# Altium PCB main.PcbDoc
Units mm, origin at the board's own origin, x right, y up, seen from the top; angles counter-clockwise.
Board outline 96 x 85 mm, 4 copper layers (Top Layer, Ground Layer, Power Layer, Bottom Layer), stack 1.591 mm thick; 55 components, 28 nets, 213 pads, 252 vias.
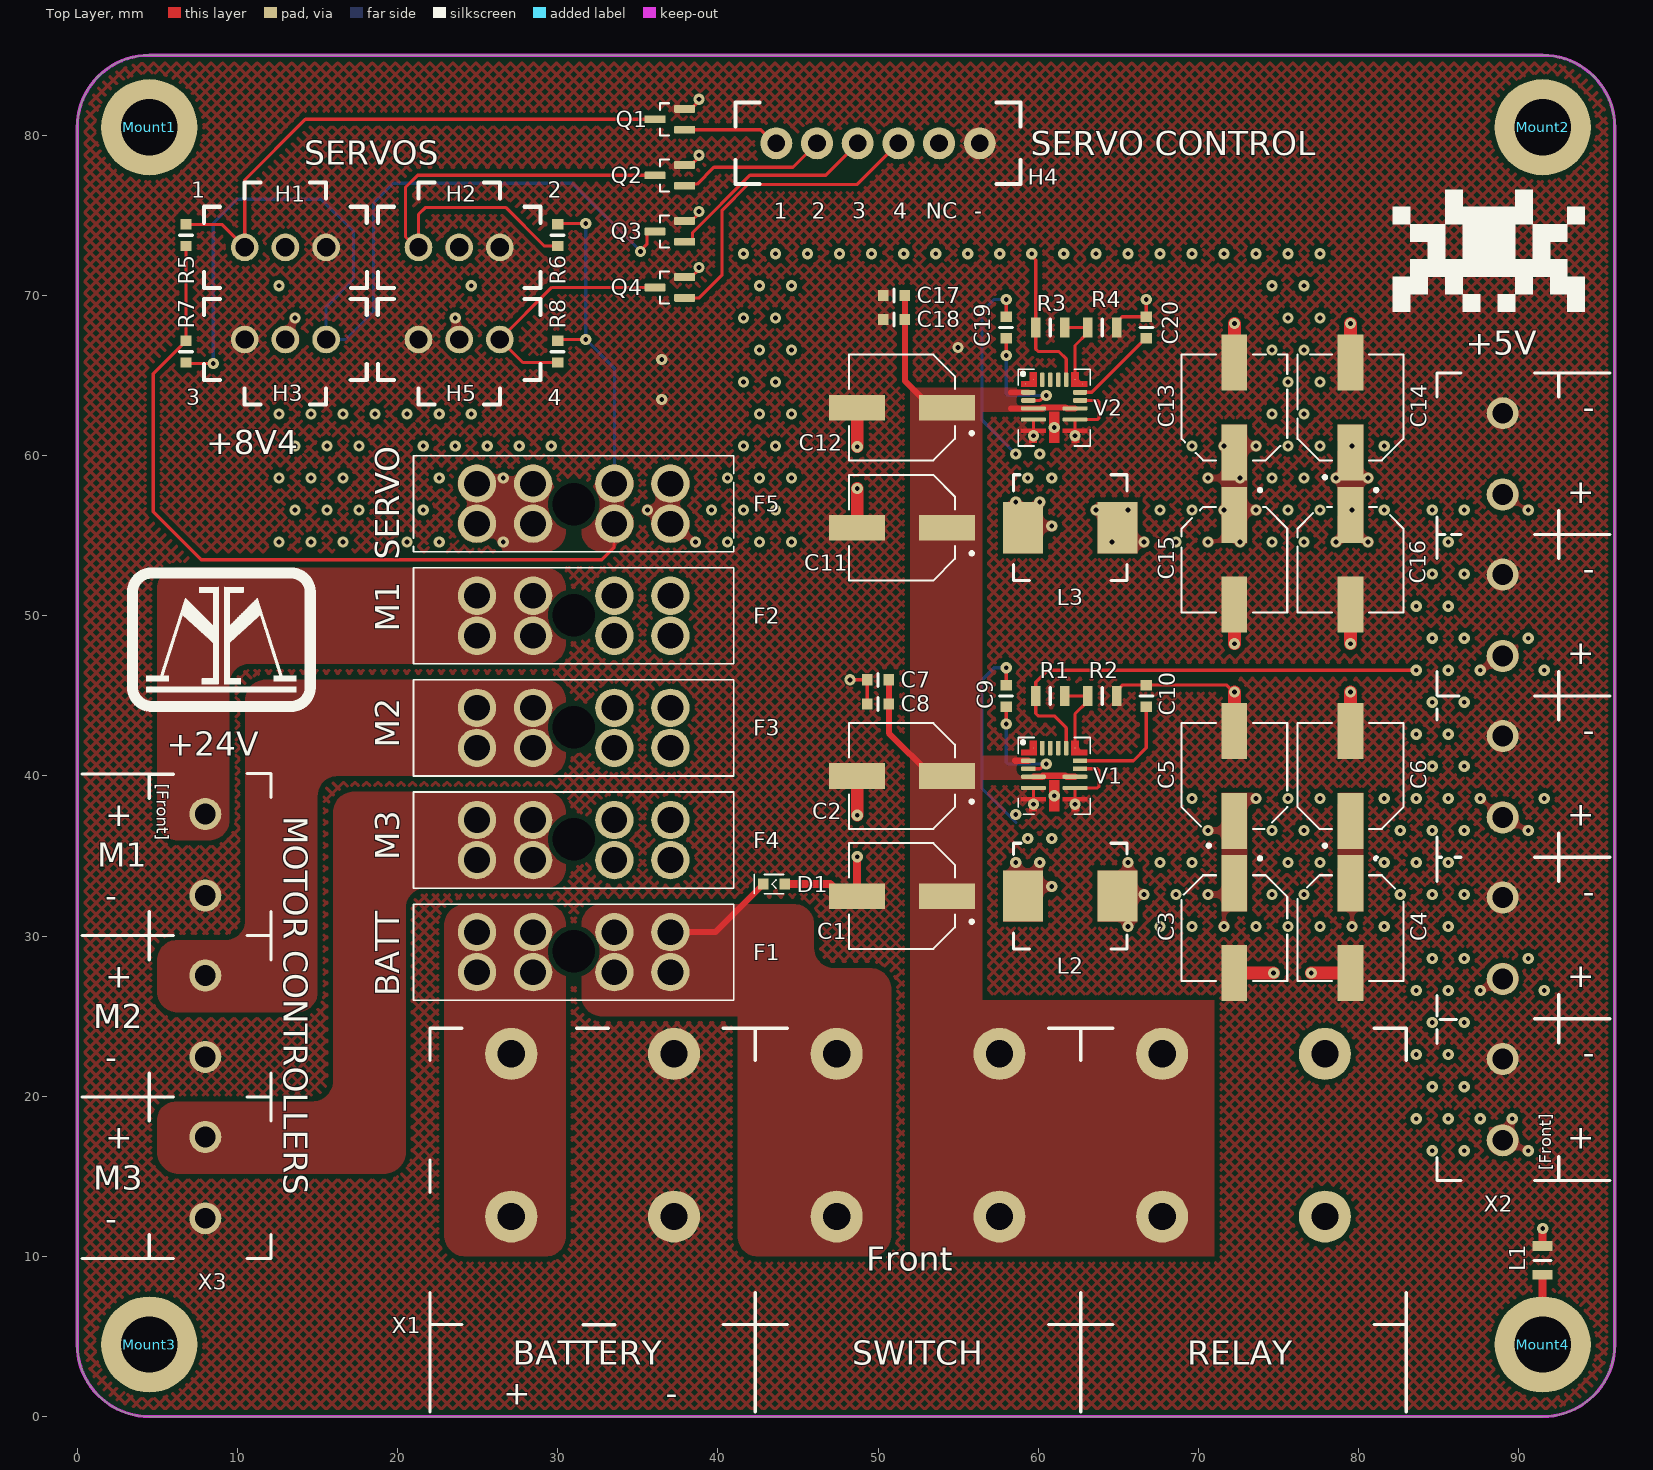
[diagram p0: Top Layer view]
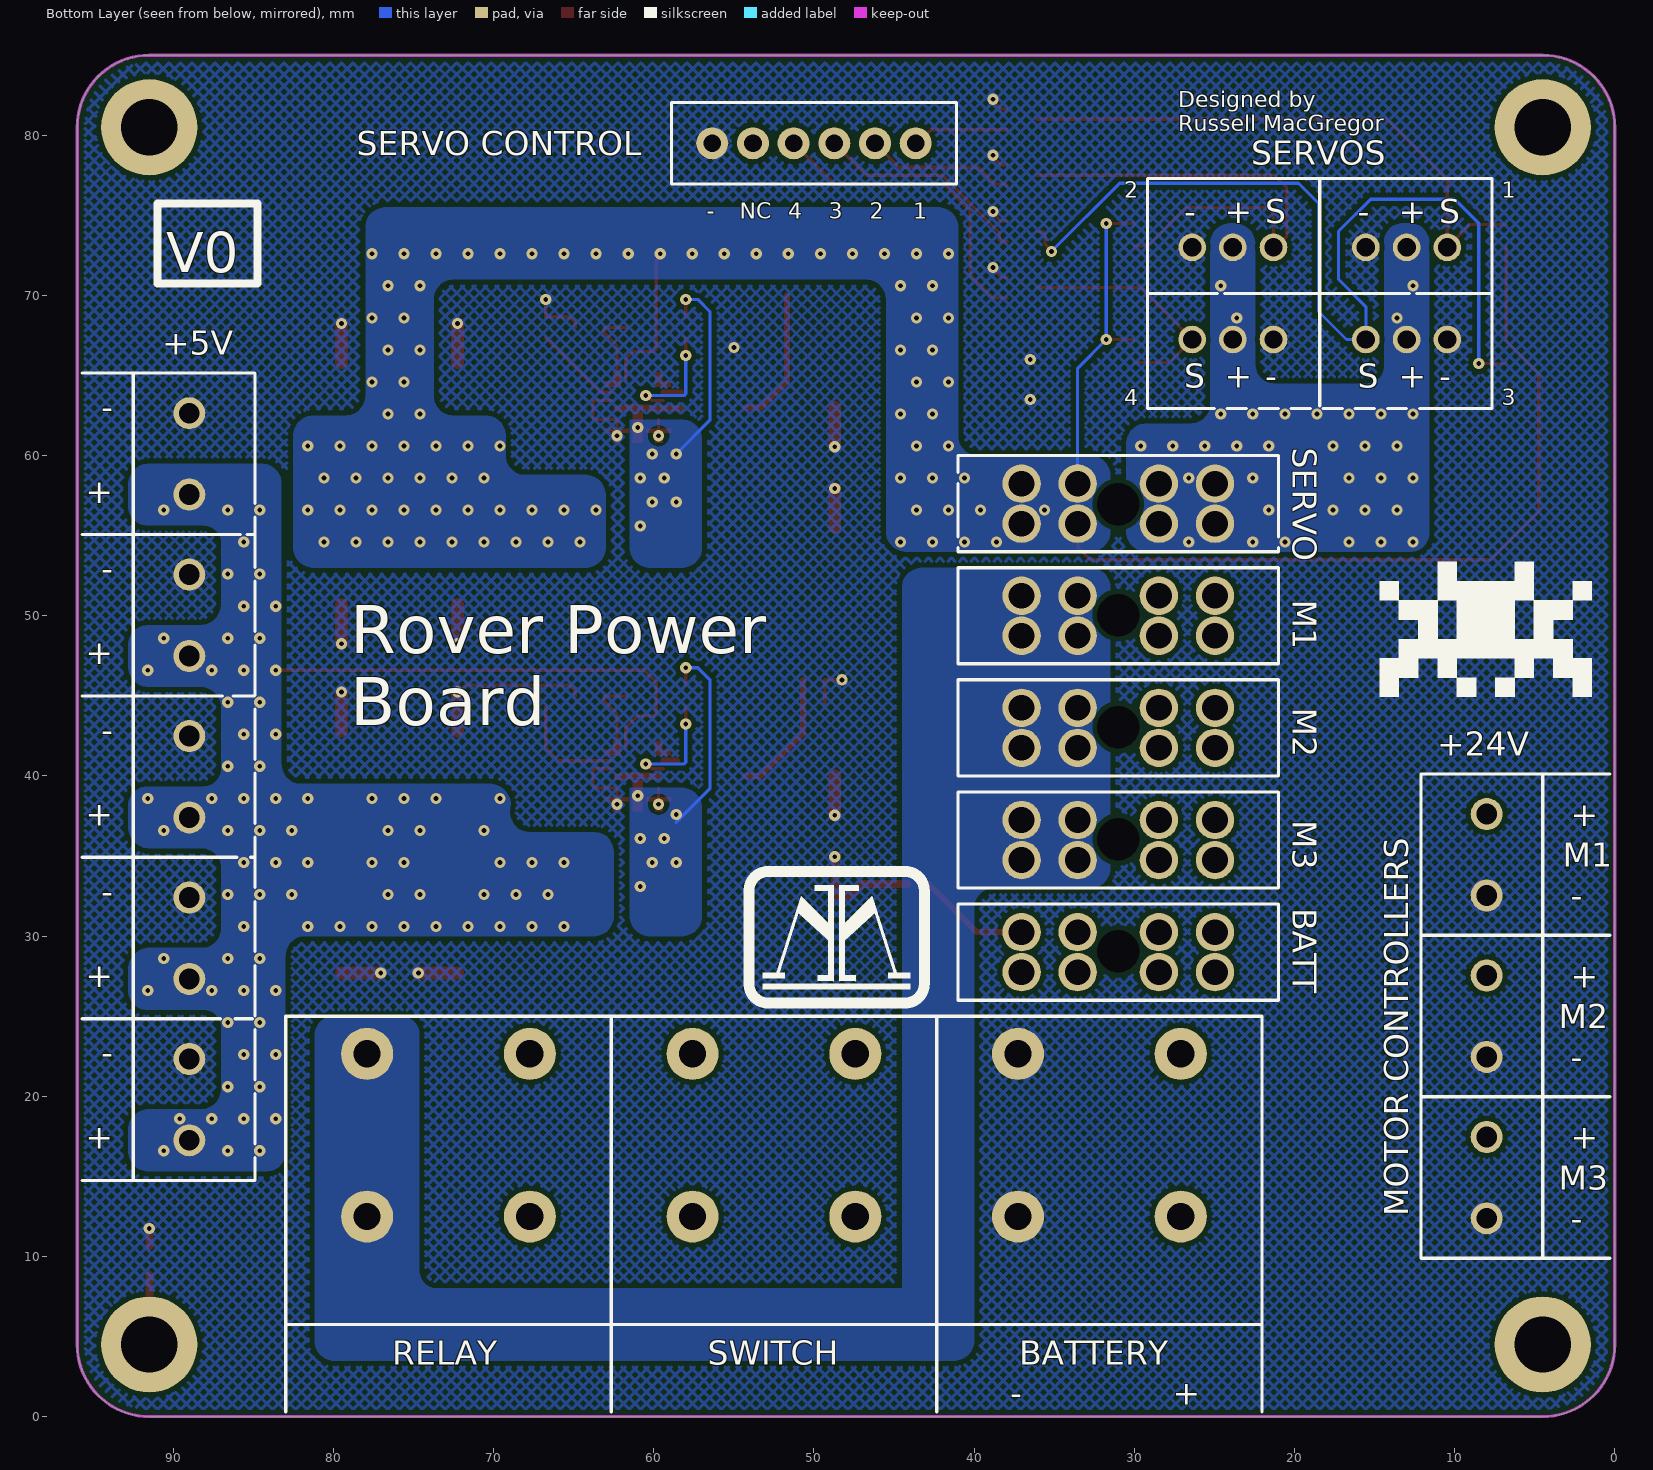
[diagram p1: Bottom Layer view, seen from below]
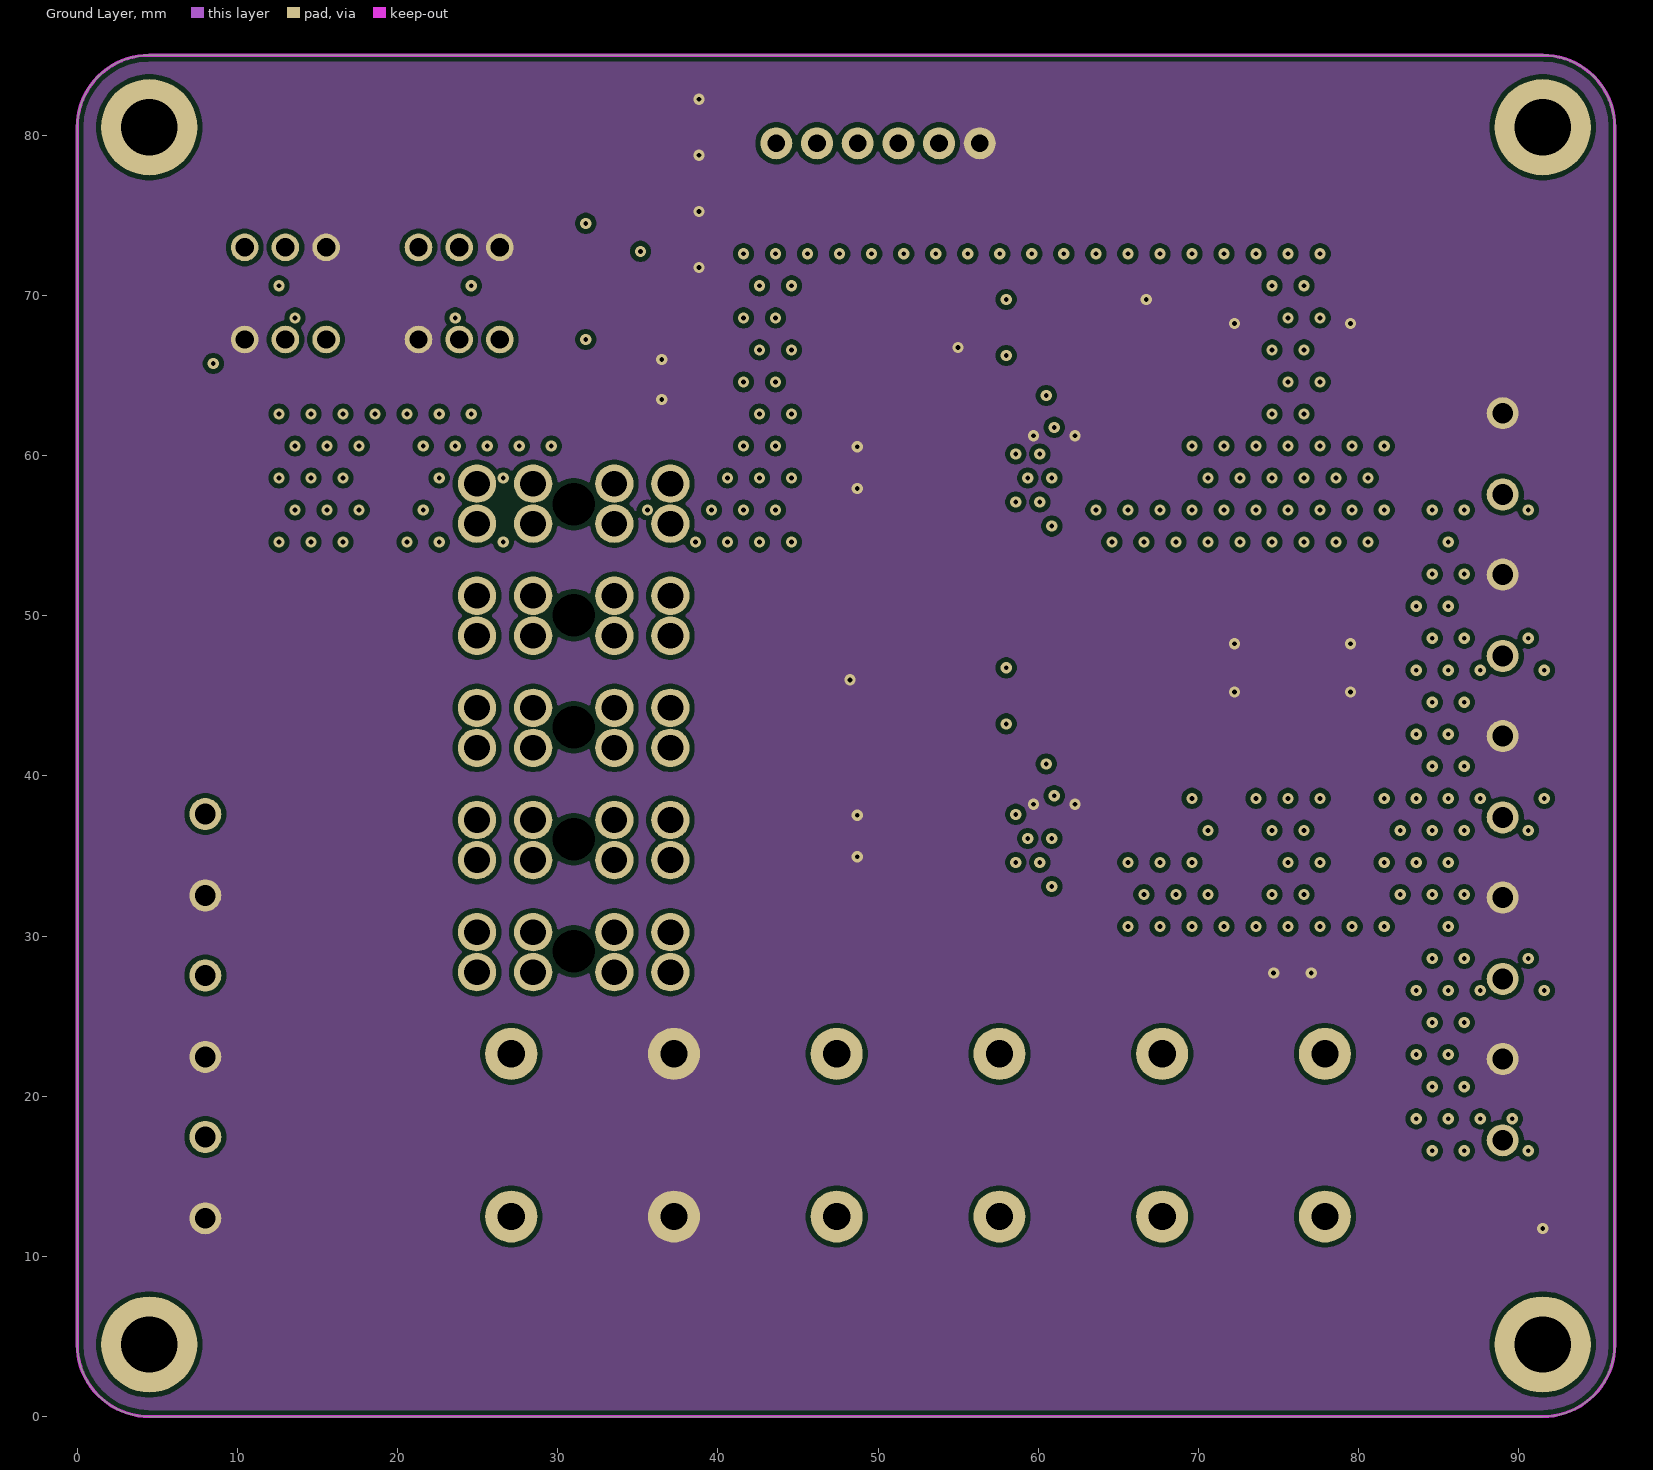
[diagram p2: Ground Layer]
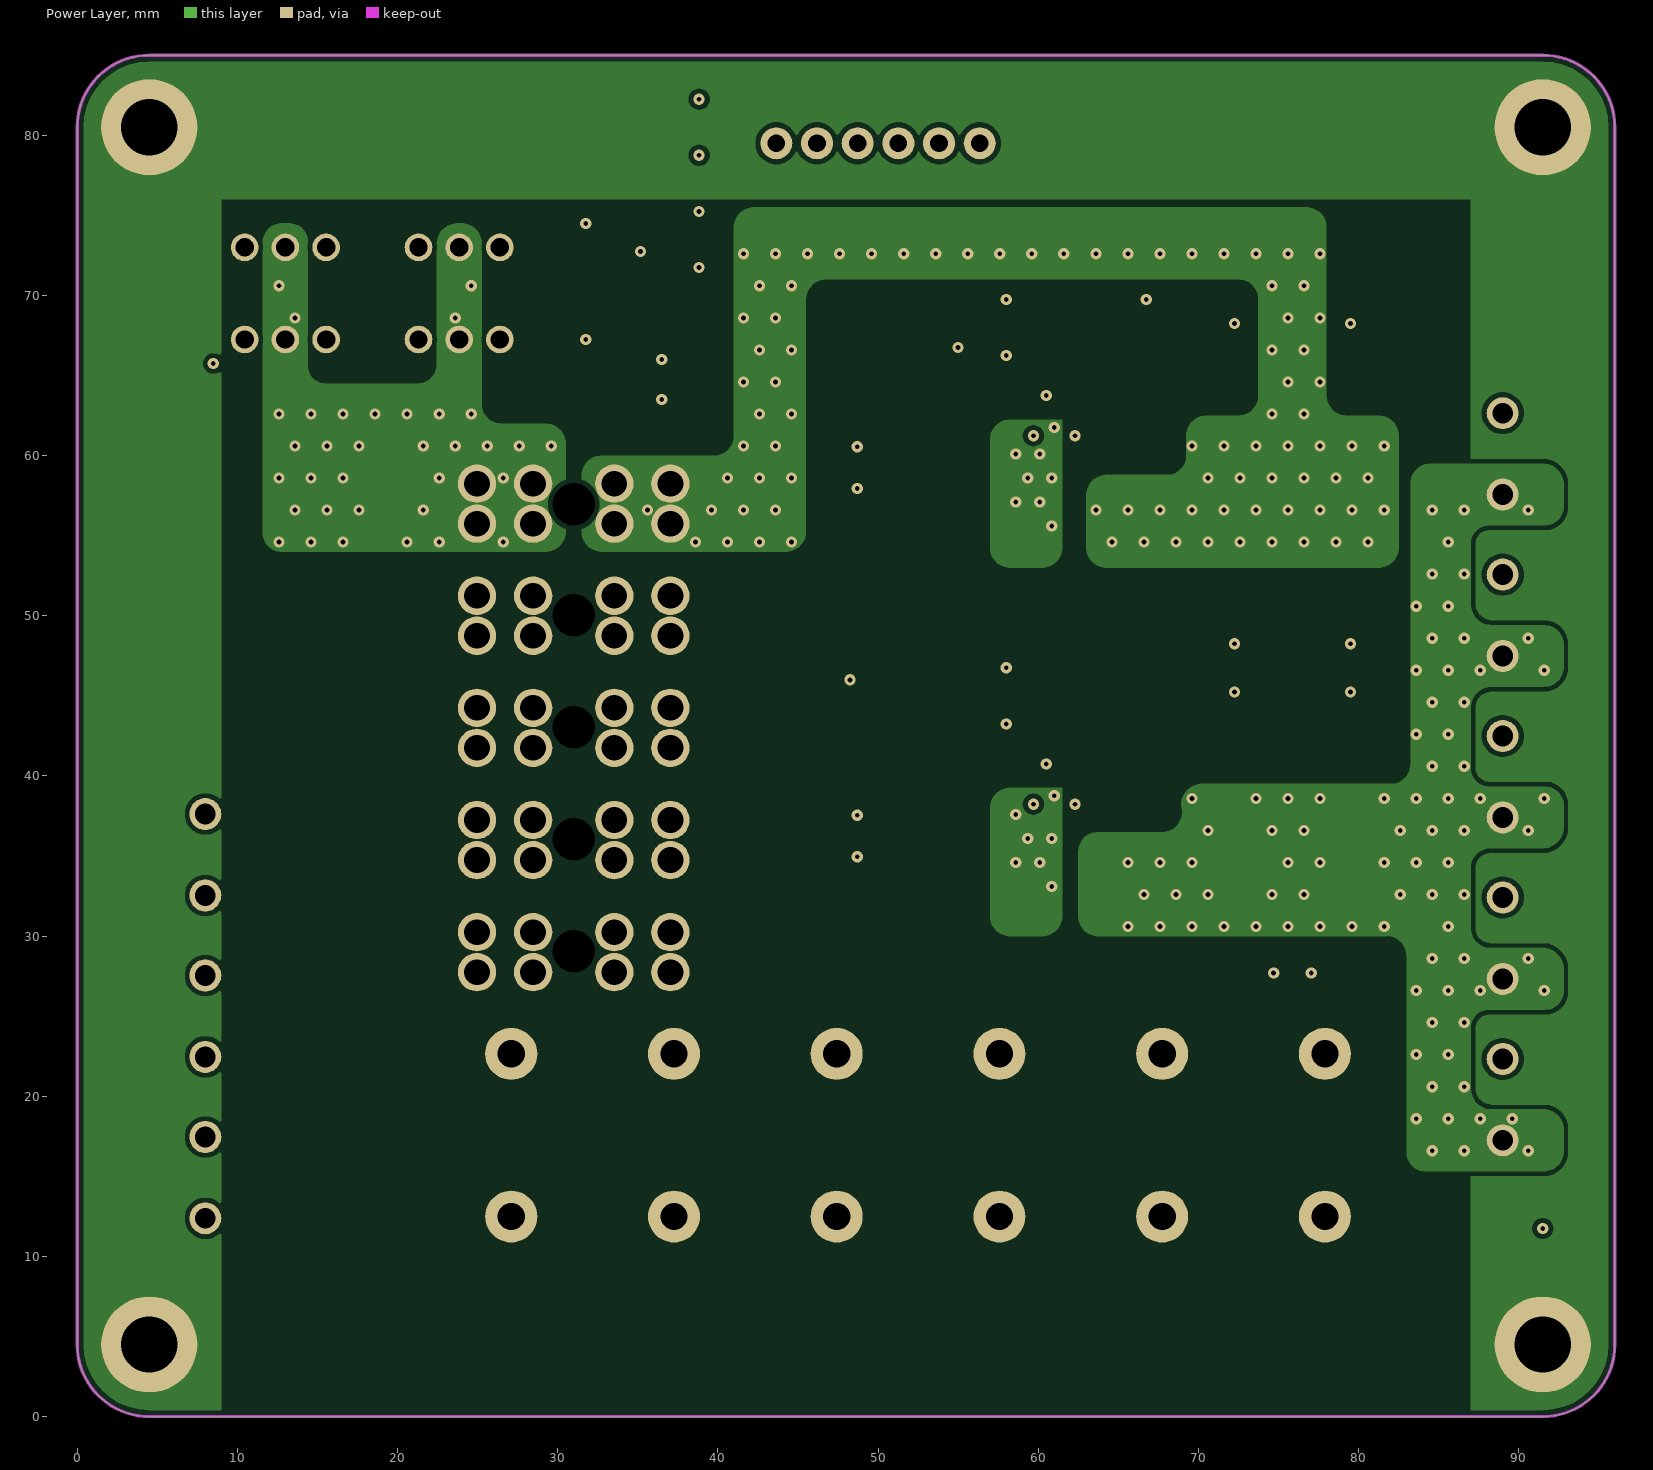
[diagram p3: Power Layer]

## Layer stack, top to bottom
Top Solder: solder mask 0.0102, Solder Resist, Dk 3.8
Top Layer: signal copper 0.035
Dielectric 2: prepreg 0.2104, 7628*1, Dk 4.4
Ground Layer: signal copper 0.0175
Dielectric 1: dielectric 1.065, FR-4, Dk 4.8
Power Layer: signal copper 0.0175
Dielectric 3: prepreg 0.2104, 7628*1, Dk 4.4
Bottom Layer: signal copper 0.035
Bottom Solder: solder mask 0.0102, Solder Resist, Dk 3.8

## Board outline
4.5,0 cw(c4.5,4.5) 0,4.5 0,80.5 cw(c4.5,80.5) 4.5,85 91.5,85 cw(c91.5,80.5) 96,80.5 96,4.5 cw(c91.5,4.5) 91.5,0

## Design rules (kind name [scope] priority, off if disabled: settings)
BoardOutlineClearance [All] p1: gap=0.2 ignorepadtopadclearanceinfootprint=FALSE
Clearance "inPolygon Clearance" [InPolygon] p1: gap=0.3 ignorepadtopadclearanceinfootprint=TRUE // this rule ensures that every net within a polygon of a different net has a set clearance from the poly
Clearance "Different Diff Pair" [All] p2: gap=0.2 ignorepadtopadclearanceinfootprint=TRUE
Clearance "Same Diff Pair" [All] p3: gap=0.1 ignorepadtopadclearanceinfootprint=TRUE
Clearance "Different Nets" [not InAnyDifferentialPair] p4: gap=0.3 ignorepadtopadclearanceinfootprint=TRUE except(0.1: Arc-SMDPad Arc-THPad Arc-Via Arc-Text Track-SMDPad Track-THPad Track-Via Track-Text SMDPad-Text THPad-Text Via-Text Fill-Text Poly-Text Region-Text Text-Text; 0.12: Arc-Arc Arc-Track Track-Track; 0.15: SMDPad-SMDPad SMDPad-THPad SMDPad-Via THPad-THPad THPad-Via Via-Via; 0.2: Arc-Hole Track-Hole SMDPad-Hole THPad-Hole Via-Hole Fill-Hole Poly-Hole Region-Hole Text-Hole)
Clearance "Same Net" [not InAnyDifferentialPair] p5: gap=0 ignorepadtopadclearanceinfootprint=TRUE except(0.1: THPad-Via; 0.18: Arc-Arc Arc-Track Track-Track)
ComponentClearance [All] p1: gap=0.102 collisioncheckmode=3 verticalgap=0.102 showdistances=TRUE
DiffPairsRouting "Ethernet Routing" [InDifferentialPairClass('Ethernet_Pairs')] p1: maxlimit=0.25 minlimit=0.2 mostfreqgap=0.25 toplayer_maxgap=0.2 toplayer_prefgap=0.2 toplayer_minwidth=0.25 toplayer_maxwidth=0.25 toplayer_prefwidth=0.25 midlayer1_mingap=0.25 midlayer1_minwidth=0.19 midlayer1_maxwidth=0.19 midlayer1_prefwidth=0.19 midlayer2_mingap=0.25 midlayer2_minwidth=0.19 midlayer2_maxwidth=0.19 midlayer2_prefwidth=0.19 bottomlayer_maxgap=0.2 bottomlayer_prefgap=0.2 bottomlayer_minwidth=0.25 bottomlayer_maxwidth=0.25 bottomlayer_prefwidth=0.25 impedanceprofiledriven=TRUE maxuncoupledlength=12.7
DiffPairsRouting "USB Routing" [InDifferentialPairClass('USB_Pairs')] p2: maxlimit=0.291 minlimit=0.127 mostfreqgap=0.291 toplayer_maxgap=0.127 toplayer_prefgap=0.127 toplayer_minwidth=0.23 toplayer_maxwidth=0.23 toplayer_prefwidth=0.23 midlayer1_mingap=0.291 midlayer1_minwidth=0.25 midlayer1_maxwidth=0.25 midlayer1_prefwidth=0.25 midlayer2_mingap=0.291 midlayer2_minwidth=0.25 midlayer2_maxwidth=0.25 midlayer2_prefwidth=0.25 bottomlayer_maxgap=0.127 bottomlayer_prefgap=0.127 bottomlayer_minwidth=0.23 bottomlayer_maxwidth=0.23 bottomlayer_prefwidth=0.23 impedanceprofiledriven=TRUE maxuncoupledlength=12.7
DiffPairsRouting "CAN Routing" [InDifferentialPairClass('CAN_Pairs')] p3: maxlimit=0.907 minlimit=0.5 mostfreqgap=0.907 toplayer_maxgap=0.5 toplayer_prefgap=0.5 toplayer_minwidth=0.201 toplayer_maxwidth=0.201 toplayer_prefwidth=0.201 midlayer1_mingap=0.907 midlayer1_minwidth=0.155 midlayer1_maxwidth=0.155 midlayer1_prefwidth=0.155 midlayer2_mingap=0.907 midlayer2_minwidth=0.155 midlayer2_maxwidth=0.155 midlayer2_prefwidth=0.155 bottomlayer_maxgap=0.5 bottomlayer_prefgap=0.5 bottomlayer_minwidth=0.201 bottomlayer_maxwidth=0.201 bottomlayer_prefwidth=0.201 impedanceprofiledriven=TRUE maxuncoupledlength=12.7
Height [All] p1: minheight=0 maxheight=1816.048 prefheight=12.7
HoleSize [All] p1: absolutevalues=TRUE maxlimit=6.3 minlimit=0.3 maxpercent=80.000 minpercent=20.000
HoleToHoleClearance [All] p1: gap=0.25 allowstackedmicrovias=FALSE
Length [All] p1: maxlimit=43.432 minlimit=0 usedelayunits=TRUE mindelay=0.000000 maxdelay=10000.000000
MatchedLengths "Diff Pair Matched Delays" [InDifferentialPairClass('Ethernet_Pairs') or InDifferentialPairClass('USB_Pairs') or InDifferentialPairClass('CAN_Pairs')] p1: tolerance=5 checknetsindiffpair=TRUE checkdiffpairvsdiffpair=FALSE checkxsignals=FALSE checkothers=FALSE usedelayunits=TRUE delaytolerance=100.000000
MinimumAnnularRing [All] p1: minimumring=0.2
MinimumSolderMaskSliver [All] p1: minsoldermaskwidth=0
PlaneClearance "Supply Net Clearance" [InNetClass('Supply_Nets')] p1: clearance=0.5
PlaneClearance "All Nets" [All] p2: clearance=0.3
PolygonConnect "Supply Nets" [InNetClass('Supply_Nets')] p1: connectstyle=Direct reliefconductorwidth=0.3 reliefentries=4 polygonreliefangle="90 Angle" airgapwidth=0.254
PolygonConnect General [All] p2: connectstyle=Relief reliefconductorwidth=0.254 reliefentries=4 polygonreliefangle="90 Angle" airgapwidth=0.254
RoutingVias [All] p1: holewidth=0.2 width=0.35 viastyle="Through Hole" minholewidth=0.15 minwidth=0.3 maxholewidth=6.3 maxwidth=6.55
SilkToSilkClearance [All] p1: silktosilkclearance=0
SilkToSolderMaskClearance [All] p1: minsilkscreentomaskgap=0 clearancetoexposedcopper=TRUE
SolderMaskExpansion [All] p1: expansion=0.075 istentingtop=FALSE
SupplyNets "Schematic Supply Nets_5" [InNet('+5V')] p1: voltage=0.000
SupplyNets "Schematic Supply Nets" [InNet('+8V4')] p2: voltage=0.000
SupplyNets "Schematic Supply Nets_3" [InNet('GND')] p3: voltage=0.000
SupplyNets "Schematic Supply Nets_1" [InNet('Earth')] p4: voltage=0.000
UnRoutedNet [All] p1: checkbadconnections=TRUE
Width [All] p1: maxlimit=100 minlimit=0.1 preferedwidth=0.3
Width "nRF Width" [InNetClass('nRF Signal')] p2: maxlimit=0.379 minlimit=0.263 preferedwidth=0.379 toplayer_minwidth=0.379 midlayer1_maxwidth=0.263 midlayer1_prefwidth=0.263 midlayer2_maxwidth=0.263 midlayer2_prefwidth=0.263 bottomlayer_minwidth=0.379 impedanceprofiledriven=TRUE minimp=50.000000 maximp=50.000000 favimp=50.000000 checkconnectedcopper=TRUE
20 further rules are at their usual default settings.

## Classes and differential pairs
net class Supply_Nets: +5V +8V4 "+24V (Batt)" "Batt VIN" Earth "FB (+5V)" "FB (+8V4)" GND "Motor VIN" NetC9_1 NetC9_2 NetC10_2 NetC19_1 NetC19_2 NetC20_2 NetF1_1 NetF2_1 NetF3_1 NetF4_1 NetF5_2 "Servo 1 PWM (8V4)" "Servo 2 PWM (8V4)" "Servo 3 PWM (8V4)" "Servo 4 PWM (8V4)"
component class "Voltage Regulators": C1 C2 C3 C4 C5 C6 C7 C8 C9 C10 C11 C12 C13 C14 C15 C16 C17 C18 C19 C20 L2 L3 R1 R2 R3 R4 V1 V2
component class "Servo Level Shifter": F5 H1 H2 H3 H4 H5 Q1 Q2 Q3 Q4 R5 R6 R7 R8
component class "Power Connections": D1 F1 F2 F3 F4 X1 X2 X3
component class Overview: L1 Mount1 Mount2 Mount3 Mount4

## Components (designator, comment, footprint, x,y, rotation, side; value= is the part's Value field where it differs from the comment)
C1 "SMD Polarized" "[Cap] SMD Polarized, 6.3mm" 51.5,32.5 r180 top
C2 "SMD Polarized" "[Cap] SMD Polarized, 6.3mm" 51.5,40 r180 top
C3 "SMD Polarized" "[Cap] SMD Polarized, 6.3mm" 72.25,30.5 r270 top
C4 "SMD Polarized" "[Cap] SMD Polarized, 6.3mm" 79.5,30.5 r270 top
C5 "SMD Polarized" "[Cap] SMD Polarized, 6.3mm" 72.25,40 r90 top
C6 "SMD Polarized" "[Cap] SMD Polarized, 6.3mm" 79.5,40 r90 top
C7 "SMD Nonpolarized" "[Cap] SMD 0603" 50,46 r0 top
C8 "SMD Nonpolarized" "[Cap] SMD 0603" 50,44.5 r0 top
C9 "SMD Nonpolarized" "[Cap] SMD 0603" 58,45 r90 top
C10 "SMD Nonpolarized" "[Cap] SMD 0603" 66.75,45 r270 top
C11 "SMD Polarized" "[Cap] SMD Polarized, 6.3mm" 51.5,55.5 r180 top
C12 "SMD Polarized" "[Cap] SMD Polarized, 6.3mm" 51.5,63 r180 top
C13 "SMD Polarized" "[Cap] SMD Polarized, 6.3mm" 72.25,63 r90 top
C14 "SMD Polarized" "[Cap] SMD Polarized, 6.3mm" 79.5,63 r90 top
C15 "SMD Polarized" "[Cap] SMD Polarized, 6.3mm" 72.25,53.5 r270 top
C16 "SMD Polarized" "[Cap] SMD Polarized, 6.3mm" 79.5,53.5 r270 top
C17 "SMD Nonpolarized" "[Cap] SMD 0603" 51,70 r0 top
C18 "SMD Nonpolarized" "[Cap] SMD 0603" 51,68.5 r0 top
C19 "SMD Nonpolarized" "[Cap] SMD 0603" 58,68 r90 top
C20 "SMD Nonpolarized" "[Cap] SMD 0603" 66.75,68 r270 top
D1 "TVS/Zener" "[Diode] SMD 0603" 43.5,33.25 r180 top
F1 "Thru-Hole" "[Fuse] Thru-Hole Blade" 31,29 r0 top
F2 "Thru-Hole" "[Fuse] Thru-Hole Blade" 31,50 r0 top
F3 "Thru-Hole" "[Fuse] Thru-Hole Blade" 31,43 r0 top
F4 "Thru-Hole" "[Fuse] Thru-Hole Blade" 31,36 r0 top
F5 "Thru-Hole" "[Fuse] Blade (2)" 31,57 r180 top
H1 "1x3 Male" "[Header] Shrouded 1x3 Male" 13,73 r0 top
H2 "1x3 Male" "[Header] Shrouded 1x3 Male" 23.85,73 r0 top
H3 "1x3 Male" "[Header] Shrouded 1x3 Male" 13,67.25 r180 top
H4 "[Header] Shrouded 1x6 Male" "[Header] Shrouded 1x6 Male" 50,79.5 r0 top
H5 "1x3 Male" "[Header] Shrouded 1x3 Male" 23.85,67.25 r180 top
L1 "742792040" "[Ferrite] SMD Bead 0805 (2)" 91.5,9.75 r90 top
L2 "SMD Inductor" "[Inductor] 7.4 X 6.6 X 3 MM" 62,32.5 r0 top
L3 "SMD Inductor" "[Inductor] 7.4 X 6.6 X 3 MM" 62,55.5 r0 top
Mount1 "M3 Mount Hole" "[Mount] M3 Mount Hole"#1 4.5,52.951 r0 top
Mount2 "M3 Mount Hole" "[Mount] M3 Mount Hole"#2 126.81,41.148 r90 top
Mount3 "M3 Mount Hole" "[Mount] M3 Mount Hole"#3 4.5,4.5 r90 top
Mount4 "M3 Mount Hole" "[Mount] M3 Mount Hole"#4 146.701,7.62 r90 top
Q1 "DMG1012UW-7" "[FET] N-Channel Mosfet" 37,81 r180 top
Q2 "DMG1012UW-7" "[FET] N-Channel Mosfet" 37,77.5 r180 top
Q3 "DMG1012UW-7" "[FET] N-Channel Mosfet" 37,74 r180 top
Q4 "DMG1012UW-7" "[FET] N-Channel Mosfet" 37,70.5 r180 top
R1 "[Res] SMD Resistor" "[Res] SMD 0805" 60.75,45 r180 top
R2 "[Res] SMD Resistor" "[Res] SMD 0805" 64,45 r180 top
R3 "[Res] SMD Resistor" "[Res] SMD 0805" 60.75,68 r180 top
R4 "[Res] SMD Resistor" "[Res] SMD 0805" 64,68 r180 top
R5 "[Res] SMD Resistor" "[Res] SMD 0603" 6.8,73.762 r270 top
R6 "[Res] SMD Resistor" "[Res] SMD 0603" 30,73.762 r90 top
R7 "[Res] SMD Resistor" "[Res] SMD 0603" 6.8,66.488 r90 top
R8 "[Res] SMD Resistor" "[Res] SMD 0603" 30,66.488 r90 top
V1 "[Reg] 0.8-10V Adjustable Buck" "[Reg] 0.8-10V Adjustable Buck" 61,40 r0 top
V2 "[Reg] 0.8-10V Adjustable Buck" "[Reg] 0.8-10V Adjustable Buck" 61,63 r0 top
X1 "[Screw Terminal] 6pin 65A" "[Screw Terminal] 6pin 65A" 52.5,15 r0 top
X2 "[Screw Terminal] 10pin" "[Screw Terminal] 10pin" 89,39.95 r90 top
X3 "[Screw Terminal] 6pin" "[Screw Terminal] 6pin" 8,25 r270 top

## Footprints (in the part's own frame and the unit in brackets; to place one, negate y for a bottom-side part, rotate by r counter-clockwise, add the part's x,y. Pads: shape width x height; smd on the part's side, far side on the other; paste and mask are expansions set on the pad)
"[Cap] SMD 0603" [mm]
  rect 0.65x0.7 smd: 1(-0.675,0) 2(0.675,0)
  silkscreen extent 0,-0.4 0,0.4, body extent -0.8,-0.45 0.8,0.45, height 0.8
"[Cap] SMD Polarized, 6.3mm" [mm]
  rect 3.5x1.6 smd: 1(-2.8,0) 2(2.8,0)
  silkscreen extent -4.45,-3.3 3.3,3.3, body extent -3.65,-3.3 3.65,3.3, height 5.9
"[Diode] SMD 0603" [mm]
  rect 0.65x0.7 smd: 1(0.675,0) 2(-0.675,0)
  silkscreen extent -0.6,-0.6 1.22,0.6, body extent -0.8,-0.45 0.8,0.45, height 0.8
"[Ferrite] SMD Bead 0805 (2)" [mm] "742792040"
  rect 0.6x1.25 smd: 1(-0.9,0) 2(0.9,0)
  silkscreen extent 0,-0.53 0,0.53, body extent -1,-0.6 1,0.6, height 1.1
"[FET] N-Channel Mosfet" [mm] "DMG1012UW-7"
  rrect25% 1.31x0.49 smd: 1(-0.925,0.65) 2(-0.925,-0.65) 3(0.925,0)
  silkscreen extent 0.05,-1 0.63,1, body extent -1.05,-1.07 1.05,1.07, height 1.1
"[Fuse] Blade (2)" [mm]
  round 2.4 hole 1.6: 1(-6.04,-1.25) 1(-6.04,1.25) 1(-2.54,-1.25) 1(-2.54,1.25) 2(2.54,-1.25) 2(2.54,1.25) 2(6.04,-1.25) 2(6.04,1.25)
  round 1.325 hole 2.65 unplated: ""(0,0.045)
  silkscreen extent -10,-3 10,3, body extent -10,-3 10,3, height 18.03
"[Fuse] Thru-Hole Blade" [mm]
  round 2.4 hole 1.6: 1(-6.04,-1.25) 1(-6.04,1.25) 1(-2.54,-1.25) 1(-2.54,1.25) 2(2.54,-1.25) 2(2.54,1.25) 2(6.04,-1.25) 2(6.04,1.25)
  round 1.325 hole 2.65 unplated: ""(0,0.045)
  silkscreen extent -10,-3 10,3, body extent -10,-3 10,3, height 18.03
"[Header] Shrouded 1x3 Male" [mm] "070543-0037 / Mates with 005057-9403"
  round 1.725 hole 1.15: 1(-2.54,0) 2(0,0) 3(2.54,0)
  silkscreen extent -5.08,-2.54 5.09,4.06, body extent -5.08,-2.54 5.08,4.06, height 11.67
"[Header] Shrouded 1x6 Male" [mm]
  round 2 hole 1.1: 1(-6.35,0) 2(-3.81,0) 3(-1.27,0) 4(1.27,0) 5(3.81,0) 6(6.35,0)
  silkscreen extent -8.9,-2.54 8.9,2.54, body extent -8.89,-2.54 8.89,4.06, height 11.49
"[Inductor] 7.4 X 6.6 X 3 MM" [mm]
  rect 2.5x3.2 smd: 1(-2.95,0) 2(2.95,0)
  silkscreen extent -3.55,-3.3 3.55,3.3, body extent -3.55,-3.3 3.55,3.3, height 3
"[Mount] M3 Mount Hole"#1 [mm] "Place at least 4.5mm from board edge. Plated."
  round 6 hole 3.5: 1(0,27.549)
"[Mount] M3 Mount Hole"#2 [mm] "Place at least 4.5mm from board edge. Plated."
  round 6 hole 3.5: 1(39.352,35.31)
"[Mount] M3 Mount Hole"#3 [mm] "Place at least 4.5mm from board edge. Plated."
  round 6 hole 3.5: 1(0,0)
"[Mount] M3 Mount Hole"#4 [mm] "Place at least 4.5mm from board edge. Plated."
  round 6 hole 3.5: 1(-3.12,55.201)
"[Reg] 0.8-10V Adjustable Buck" [mm] "MAX20408AFOF/VY+"
  rrect50% 0.9x0.3 smd: 1(-1.612,0.95) 2(-1.612,0.45) 10(1.612,0.45) 11(1.612,0.95)
  rrect50% 1.55x0.25 smd: 3(-1.299,-0.05) 4(-1.299,-0.75) 8(1.3,-0.75) 9(1.3,-0.05)
  round 0.025 smd: 5(-1.3,-1.763) 6(0,-1.238) 7(1.3,-1.763) 12(1.3,1.75) 12(1.787,1.475) 17(-1.788,1.475) 17(-1.3,1.75)
  rect 0.127x0.127 smd paste-0.064 mask-0.064: 10(1.612,0.45) 11(1.612,0.95)
  rrect50% 0.3x0.9 smd: 13(0.75,1.736) 14(0.25,1.736) 15(-0.25,1.737) 16(-0.75,1.737)
  Top Layer region: 2.05,1.65 1.525,1.65 1.525,1.3 2.05,1.3
  Top Layer region: 1.525,1.65 1.525,1.3 1.075,1.3 1.075,2.2 1.525,2.2
  Top Layer region: -2.05,1.65 -1.525,1.65 -1.525,1.3 -2.05,1.3
  Top Layer region: -1.525,1.65 -1.525,1.3 -1.075,1.3 -1.075,2.2 -1.525,2.2
  Top Layer region: 1.1,-1.575 0.525,-1.575 0.525,-1.325 2.075,-1.325 2.075,-1.575 1.55,-1.575 1.55,-2.2 1.1,-2.2
  Top Layer region: -1.1,-1.575 -0.525,-1.575 -0.525,-1.325 -2.075,-1.325 -2.075,-1.575 -1.55,-1.575 -1.55,-2.2 -1.1,-2.2
  Top Layer region: -0.3,-0.275 0.3,-0.275 0.3,-2.2 -0.3,-2.2
  silkscreen extent -2.25,-2.4 2.25,2.4, body extent -1.75,-1.88 1.75,1.88, height 0.8
"[Res] SMD 0603" [mm]
  rect 0.65x0.7 smd: 1(-0.675,0) 2(0.675,0)
  silkscreen extent 0,-0.4 0,0.4, body extent -0.8,-0.45 0.8,0.45, height 0.8
"[Res] SMD 0805" [mm]
  rect 0.6x1.25 smd: 1(-0.9,0) 2(0.9,0)
  silkscreen extent 0,-0.53 0,0.53, body extent -1,-0.63 1,0.63, height 0.5
"[Screw Terminal] 6pin" [mm]
  round 2 hole 1.3: 1(-12.62,0) 2(-7.54,0) 3(-2.54,0) 4(2.54,0) 5(7.54,0) 6(12.62,0)
  silkscreen extent -15.15,-3.5 15.13,4.1, body extent -15.53,-3.5 15.13,4.1, height 9.99
"[Screw Terminal] 6pin 65A" [mm]
  round 3.25 hole 1.7: 1(-25.4,-2.51) 1(-25.4,7.65) 2(-15.24,-2.51) 2(-15.24,7.65) 3(-5.08,-2.51) 3(-5.08,7.65) 4(5.08,-2.51) 4(5.08,7.65) 5(15.24,-2.51) 5(15.24,7.65) 6(25.4,-2.51) 6(25.4,7.65)
  silkscreen extent -30.48,-9.27 30.48,9.25, body extent -30.41,-9.27 31.21,9.21, height 28.49
"[Screw Terminal] 10pin" [mm]
  round 2 hole 1.3: 1(-22.7,0) 2(-17.62,0) 3(-12.62,0) 4(-7.54,0) 5(-2.54,0) 6(2.54,0) 7(7.54,0) 8(12.62,0) 9(17.62,0) 10(22.7,0)
  silkscreen extent -25.21,-3.5 25.21,4.1, body extent -25.65,-3.5 25.21,4.1, height 9.99

## Part data
C1 C2 C3 C4 C5 C6 C11 C12 C13 C14 C15 C16: library part "[Cap] SMD Polarized", Capacitance=47uF, Max Voltage=35V, Supplier Part Number 1=PCE3842CT-ND, Tolerance=20%, Diameter=6.3mm, Supplier 1=DigiKey
C7 C8 C9 C17 C18 C19: library part "[Cap] SMD Nonpolarized", Capacitance=100nF, Size Package=0603, Supplier Part Number 1=1276-1003-1-ND, Tolerance=10%, Voltage=50V, Supplier 1=DigiKey
C10 C20: library part "[Cap] SMD Nonpolarized", Capacitance=2.2uF, Size Package=0603, Supplier Part Number 1=1276-1134-1-ND, Tolerance=10%, Voltage=50V, Supplier 1=DigiKey
D1: library part "[Diode] TVS Diode", "Generic", Size Package=0603, Supplier Part Number 1=641-1679-1-ND, Supplier 1=DigiKey
F1 F2 F3 F4: library part "[Fuse] Thru-Hole Blade", Capacity=20A, Supplier Part Number 1=WK6265-ND, Supplier 1=DigiKey
F5: library part "[Fuse] Thru-Hole Blade", Capacity=10A
H1 H2 H3 H5: library part "[Header] Shrouded 1x3 Male", "070543-0037 / Mates with 005057-9403", Supplier Part Number 1=WM4825-ND, Supplier 1=DigiKey, Supplier 2=DigiKey, Supplier Part Number 2=WM2901-ND
H4: "0705430005 / Mates with 0050579406", Supplier Part Number 1=WM4804-ND, Supplier 1=DigiKey, Supplier 2=DigiKey, Supplier Part Number 2=WM2904-ND
L1: library part "[Ferrite] SMD Ferrite Bead (2)", Supplier Part Number 1=732-1620-1-ND, Supplier 1=DigiKey
L2 L3: library part "[Inductor] SMD Inductor", Inductance=2.2uH, Size Package=Nonstandard, Supplier Part Number 1=XC2402CT-ND, Supplier 1=DigiKey
Mount1 Mount2 Mount3 Mount4: library part "[Mount] M3 Mount Hole", "Place at least 4.5mm from board edge. Plated."
Q1 Q2 Q3 Q4: library part "[FET] N-Channel MOSFET"
R1: "Generic", Resistance=52.5k, Size Package=0805, Tolerance=10%
R2: "Generic", Resistance=10k, Size Package=0805, Tolerance=10%
R3: "Generic", Resistance=95k, Size Package=0805, Tolerance=1%
R4: "Generic", Resistance=10k, Size Package=0805, Tolerance=1%
R5 R6 R7 R8: "Generic", Resistance=1k, Size Package=0603, Tolerance=5%
V1 V2: "MAX20408AFOF/VY+", Supplier Part Number 1=505-MAX20408AFOF/VY+-ND, Supplier 1=DigiKey
X1: "Remember to order 3 of the screw term for one of these!", Supplier Part Number 1=A107722-ND, Supplier 1=DigiKey
X2: "x5", Supplier Part Number 1=102-6145-ND, Supplier 1=DigiKey
X3: "x3", Supplier Part Number 1=102-6145-ND, Supplier 1=DigiKey

## Via types
v1: diameter 0.7, hole 0.3, Top Layer to Bottom Layer, 252 vias

## Nets (pads, with @x,y where several pads share a name; then routed paths per layer and width w, separated by ;. In a path a pad name is that pad's centre, name@x,y a point inside that pad or via, vN(x,y) a via of type N, cw(c..) or ccw(c..) an arc to the next point about the centre after c; other vN are vias at no path point)
+5V: C3.1 C4.1 C5.1 C6.1 L2.2 R1.2 V1.13 X2.1 X2.3 X2.5 X2.7 X2.9 | length 29.5
  Top Layer w0.2: V1.13 61.75,43 61,43.75 60,43.75 59.85,43.9 R1.2 59.85,45.85 60.6,46.6 v1(83.6,46.6)
  other v1: 84.6,16.6 86.6,16.6 90.6,16.6 83.6,18.6 85.6,18.6 87.6,18.6 89.6,18.6 84.6,20.6 86.6,20.6 83.6,22.6 85.6,22.6 84.6,24.6 86.6,24.6 83.6,26.6 85.6,26.6 87.6,26.6 91.6,26.6 84.6,28.6 86.6,28.6 90.6,28.6 65.6,30.6 67.6,30.6 69.6,30.6 71.6,30.6 73.6,30.6 75.6,30.6 77.6,30.6 79.6,30.6 81.6,30.6 85.6,30.6 66.6,32.6 68.6,32.6 70.6,32.6 74.6,32.6 76.6,32.6 82.6,32.6 84.6,32.6 86.6,32.6 65.6,34.6 67.6,34.6 69.6,34.6 75.6,34.6 77.6,34.6 81.6,34.6 83.6,34.6 85.6,34.6 70.6,36.6 74.6,36.6 76.6,36.6 82.6,36.6 84.6,36.6 86.6,36.6 90.6,36.6 69.6,38.6 73.6,38.6 75.6,38.6 77.6,38.6 81.6,38.6 83.6,38.6 85.6,38.6 87.6,38.6 91.6,38.6 84.6,40.6 86.6,40.6 83.6,42.6 85.6,42.6 84.6,44.6 86.6,44.6 85.6,46.6 87.6,46.6 91.6,46.6 84.6,48.6 86.6,48.6 90.6,48.6 83.6,50.6 85.6,50.6 84.6,52.6 86.6,52.6 85.6,54.6 84.6,56.6 86.6,56.6 90.6,56.6
+8V4: C13.1 C14.1 C15.1 C16.1 F5.1 L3.2 R3.2 R5.2 R6.2 R7.2 R8.2 V2.13 | length 79.3
  Top Layer w0.2: R5.2 R7.2 6.775,67.163 6.55,66.938 6.55,66.913 4.75,65.113 4.75,56.5 7.75,53.5 32.75,53.5 33.52,54.27 33.52,55.73 F5.1@33.54,55.75 ; R8.2 30.087,67.25 v1(31.75,67.25) ; R6.2 30.063,74.5 v1(31.75,74.5) ; v1(59.6,72.6) 59.6,72.465 59.85,72.215 R3.2 59.85,66.65 60,66.5 61.289,66.5 61.75,66.039 61.75,66 V2.13
  Bottom Layer w0.2: v1(31.75,74.5) v1(31.75,67.25) 33.54,65.46 F5.1@33.54,58.25
  other v1: 38.6,54.6 40.6,54.6 42.6,54.6 44.6,54.6 64.6,54.6 66.6,54.6 68.6,54.6 70.6,54.6 72.6,54.6 74.6,54.6 76.6,54.6 78.6,54.6 80.6,54.6 35.6,56.6 39.6,56.6 41.6,56.6 43.6,56.6 63.6,56.6 65.6,56.6 67.6,56.6 69.6,56.6 71.6,56.6 73.6,56.6 75.6,56.6 77.6,56.6 79.6,56.6 81.6,56.6 40.6,58.6 42.6,58.6 44.6,58.6 70.6,58.6 72.6,58.6 74.6,58.6 76.6,58.6 78.6,58.6 80.6,58.6 41.6,60.6 43.6,60.6 69.6,60.6 71.6,60.6 73.6,60.6 75.6,60.6 77.6,60.6 79.6,60.6 81.6,60.6 42.6,62.6 44.6,62.6 74.6,62.6 76.6,62.6 41.6,64.6 43.6,64.6 75.6,64.6 77.6,64.6 42.6,66.6 44.6,66.6 74.6,66.6 76.6,66.6 41.6,68.6 43.6,68.6 75.6,68.6 77.6,68.6 42.6,70.6 44.6,70.6 74.6,70.6 76.6,70.6 41.6,72.6 43.6,72.6 45.6,72.6 47.6,72.6 49.6,72.6 51.6,72.6 53.6,72.6 55.6,72.6 57.6,72.6 61.6,72.6 63.6,72.6 65.6,72.6 67.6,72.6 69.6,72.6 71.6,72.6 73.6,72.6 75.6,72.6 77.6,72.6
"+24V (Batt)": C1.1 C2.1 C7.2 C8.2 C11.1 C12.1 C17.2 C18.2 V1.1 V1.3 V1.9 V2.1 V2.3 V2.9 X1.4 X1.5 | length 25.3
  Top Layer w0.381: C7.2 C8.2 50.675,42.675 53.35,40 C2.1 ; C17.2 C18.2 51.675,64.675 53.35,63 C12.1 ; 58.3,62.95 V2.3 60.22,62.95 60.285,63.016 61.715,63.016 61.781,62.95 V2.9 ; 58.3,63.95 V2.1 ; 58.55,40.95 V1.1 ; V1.3 60.22,39.95 60.285,40.016 61.715,40.016 61.781,39.95 V1.9
"Batt VIN": D1.1 F1.2 X1.3 | length 7
  Top Layer w0.381: F1.2@37.04,30.25 39.85,30.25 42.825,33.225 D1.1
Earth: L1.1 Mount1.1 Mount2.1 Mount3.1 Mount4.1 | length 4.3
  Top Layer w0.5: Mount4.1 L1.1
"FB (+5V)": R1.1 R2.2 V1.12 | length 5.6
  Top Layer w0.2: R1.1 R2.2 63.1,44.675 62.3,43.875 V1.12@62.3,41.75
  Top Layer w0.381: V1.12@62.3,41.75 62.575,41.475 V1.12@62.787,41.475
"FB (+8V4)": R3.1 R4.2 V2.12 | length 5.6
  Top Layer w0.2: R3.1 R4.2 63.1,67.675 62.3,66.875 V2.12@62.3,64.75
  Top Layer w0.381: V2.12@62.3,64.75 62.575,64.475 V2.12@62.787,64.475
GND: C1.2 C2.2 C3.2 C4.2 C5.2 C6.2 C7.1 C8.1 C10.1 C11.2 C12.2 C13.2 C14.2 C15.2 C16.2 C17.1 C18.1 C20.1 D1.2 H1.3 H2.3 H3.3 H4.6 H5.3 L1.2 Q1.2 Q2.2 Q3.2 Q4.2 R2.1 R4.1 V1.4 V1.5 V1.7 V1.8 V1.10 V2.4 V2.5 V2.7 V2.8 V2.10 X1.2 X2.2 X2.4 X2.6 X2.8 X2.10 X3.2 X3.4 X3.6 | length 65.7
  Top Layer w0.2: Q4.2 38.335,71.15 38.83,71.645 v1(38.83,71.75) ; Q3.2 38.335,74.65 38.83,75.145 v1(38.83,75.25) ; Q2.2 38.335,78.15 38.83,78.645 v1(38.83,78.75) ; Q1.2 38.335,81.65 38.83,82.145 v1(38.83,82.25) ; v1(48.25,46) C7.1 C8.1 ; v1(59.7,38.238) V1.4 ; v1(59.7,61.238) V2.4 ; v1(62.3,38.238) V1.8@62.3,39.25 ; V1.8 63.689,39.25 63.8,39.361 63.8,40.339 63.689,40.45 V1.10@62.613,40.45 ; v1(62.3,61.238) V2.8@62.3,62.25 ; V2.8 63.689,62.25 63.8,62.361 63.8,63.339 63.689,63.45 V2.10@62.612,63.45 ; R2.1 64.9,45.325 65.25,45.675 C10.1 71.784,45.675 72.209,45.25 v1(72.25,45.25) ; R4.1 64.9,68.325 65.25,68.675 C20.1 v1(66.75,69.75)
  Top Layer w0.5: D1.2 47,33.25 47.75,32.5 C1.2 v1(48.7,34.95) ; L1.2 v1(91.5,11.75)
  Top Layer w0.8: v1(48.7,37.55) C2.2 ; C11.2 v1(48.7,57.95) ; v1(48.7,60.55) C12.2 ; C3.2 v1(74.7,27.7) ; C5.2 v1(72.25,45.25) ; v1(72.25,48.25) C15.2 ; C13.2 v1(72.25,68.25) ; v1(77.05,27.7) C4.2 ; C6.2 v1(79.5,45.25) ; v1(79.5,48.25) C16.2 ; C14.2 v1(79.5,68.25)
  other v1: 36.5,63.5 36.5,66 55,66.75
"Motor VIN": F2.2 F3.2 F4.2 X1.6
NetC9_1: C9.1 V1.2 | length 7.2
  Top Layer w0.2: v1(58,43.25) C9.1 ; V1.2 60.118,40.45 60.418,40.75 v1(60.5,40.75)
  Bottom Layer w0.2: v1(58,43.25) 58,40.861 58.111,40.75 v1(60.5,40.75)
NetC9_2: C9.2 L2.1 V1.6 | length 12.7
  Top Layer w0.2: C9.2 v1(58,46.75)
  Bottom Layer w0.2: v1(58,46.75) 57.25,46.75 56.5,46 56.5,39.2 58.6,37.1
  other v1: 60.85,33.1 58.6,34.6 60.1,34.6 59.35,36.1 60.85,36.1 58.6,37.6 61,38.763
NetC10_2: C10.2 V1.11 | length 7
  Top Layer w0.2: V1.11@62.612,40.95 65.95,40.95 66.75,41.75 C10.2
NetC19_1: C19.1 V2.2 | length 7.2
  Top Layer w0.2: v1(58,66.25) C19.1 ; V2.2 60.118,63.45 60.418,63.75 v1(60.5,63.75)
  Bottom Layer w0.2: v1(58,66.25) 58,63.861 58.111,63.75 v1(60.5,63.75)
NetC19_2: C19.2 L3.1 V2.6 | length 12.7
  Top Layer w0.2: C19.2 v1(58,69.75)
  Bottom Layer w0.2: v1(58,69.75) 57.25,69.75 56.5,69 56.5,62.2 v1(58.6,60.1)
  other v1: 60.85,55.6 58.6,57.1 60.1,57.1 59.35,58.6 60.85,58.6 60.1,60.1 61,61.763
NetC20_2: C20.2 V2.11 | length 5.5
  Top Layer w0.2: V2.11@62.612,63.95 63.35,63.95 66.725,67.325 C20.2
NetF1_1: F1.1 X1.1
NetF2_1: F2.1 X3.1
NetF3_1: F3.1 X3.3
NetF4_1: F4.1 X3.5
NetF5_2: F5.2 H1.2 H2.2 H3.2 H5.2
  other v1: 12.6,54.6 14.6,54.6 16.6,54.6 20.6,54.6 22.6,54.6 26.6,54.6 13.6,56.6 15.6,56.6 17.6,56.6 21.6,56.6 12.6,58.6 14.6,58.6 16.6,58.6 22.6,58.6 26.6,58.6 13.6,60.6 15.6,60.6 17.6,60.6 21.6,60.6 23.6,60.6 25.6,60.6 27.6,60.6 29.6,60.6 12.6,62.6 14.6,62.6 16.6,62.6 18.6,62.6 20.6,62.6 22.6,62.6 24.6,62.6 13.6,68.6 23.6,68.6 12.6,70.6 24.6,70.6
"Servo 1 PWM (3V3)": H4.1 Q1.1 | length 6.1
  Top Layer w0.2: Q1.1 42.69,80.35 43.54,79.5 H4.1
"Servo 1 PWM (8V4)": H1.1 Q1.3 R5.1 | length 35.7
  Top Layer w0.2: R5.1 9.023,74.437 H1.1 10.46,77.21 14.25,81 Q1.3
"Servo 2 PWM (3V3)": H4.2 Q2.1 | length 9.4
  Top Layer w0.2: Q2.1 38.028,76.953 38.703,76.953 39.75,78 44.69,78 H4.2
"Servo 2 PWM (8V4)": H2.1 Q2.3 R6.1 | length 32
  Top Layer w0.2: R6.1 29.163,73.087 26.75,75.5 21.75,75.5 21.31,75.06 H2.1 21.148,73 20.5,73.648 20.5,76.75 21.25,77.5 Q2.3
"Servo 3 PWM (3V3)": H4.3 Q3.1 | length 13.8
  Top Layer w0.2: Q3.1 38.274,73.35 38.419,73.495 38.419,73.919 42,77.5 46.73,77.5 H4.3 ; Q3.1@38.335,73.35 Q3.1@38.48,73.495
"Servo 3 PWM (8V4)": H3.1 Q3.3 R7.1 | length 59.3
  Top Layer w0.2: R7.1 6.863,65.75 v1(8.5,65.75) ; v1(35.17,72.75) 35.17,72.818 35.581,73.23 35.581,73.855 35.726,74 Q3.3
  Bottom Layer w0.2: v1(8.5,65.75) 8.5,74.5 10,76 15.25,76 17.25,74 17.25,71 15.54,69.29 H3.1 16.75,67.25 18.5,69 18.5,75.75 19.75,77 30.92,77 v1(35.17,72.75)
"Servo 4 PWM (3V3)": H4.4 Q4.1 | length 19.7
  Top Layer w0.2: Q4.1 38.85,69.85 40.25,71.25 40.25,75.297 41.883,76.93 48.7,76.93 H4.4
"Servo 4 PWM (8V4)": H5.1 Q4.3 R8.1 | length 15.2
  Top Layer w0.2: R8.1 27.827,65.813 H5.1 29.64,70.5 Q4.3
pads on no net: F1. F2. F3. F4. F5. H4.5 V1.14 V1.15 V1.16 V1.17 V2.14 V2.15 V2.16 V2.17

## Polygon pours and split planes (outlines as drawn)
NetC19_2 on Top Layer "LX Top Poly" (solid, remove dead copper, pour order 36): 61.5,62.25 61.5,54.25 cw(c60.25,54.25) 60.25,53 58.25,53 cw(c58.25,54.25) 57,54.25 57,61 cw(c58.25,61) 58.25,62.25
NetC9_2 on Top Layer "LX Top Poly" (solid, remove dead copper, pour order 35): 61.5,39.25 61.5,31.25 cw(c60.25,31.25) 60.25,30 58.25,30 cw(c58.25,31.25) 57,31.25 57,38 cw(c58.25,38) 58.25,39.25
+5V on Top Layer "+5V Top Poly" (solid, remove dead copper, pour order 34): 63.75,36.5 67.75,36.5 ccw(c67.75,37.75) 68.925,38.175 cw(c70.25,38.175) 70.25,39.5 82,39.5 ccw(c82,40.75) 83.25,40.75 83.25,58.25 cw(c84.5,58.25) 84.5,59.5 91.5,59.5 cw(c91.5,58.2) 92.8,58.2 92.8,56.8 cw(c91.64,56.8) 91.64,55.64 88.14,55.64 ccw(c88.14,54.5) 87,54.5 87,50.75 ccw(c88.33,50.75) 88.33,49.42 91.58,49.42 cw(c91.58,48.2) 92.8,48.2 92.8,46.8 cw(c91.56,46.8) 91.56,45.56 88.31,45.56 ccw(c88.31,44.25) 87,44.25 87,40.5 ccw(c88.16,40.5) 88.16,39.34 91.66,39.34 cw(c91.66,38.2) 92.8,38.2 92.8,36.8 cw(c91.48,36.8) 91.48,35.48 88.23,35.48 ccw(c88.23,34.25) 87,34.25 87,30.5 ccw(c88.24,30.5) 88.24,29.26 91.49,29.26 cw(c91.49,27.95) 92.8,27.95 92.8,26.55 cw(c91.65,26.55) 91.65,25.4 88.15,25.4 ccw(c88.15,24.25) 87,24.25 87,20.5 ccw(c88.32,20.5) 88.32,19.18 91.57,19.18 cw(c91.57,17.95) 92.8,17.95 92.8,16.55 cw(c91.57,16.55) 91.57,15.32 84.18,15.32 cw(c84.18,16.5) 83,16.5 83,28.75 ccw(c81.75,28.75) 81.75,30 63.75,30 cw(c63.75,31.25) 62.5,31.25 62.5,35.25 cw(c63.75,35.25)
+8V4 on Top Layer "+8V4 Top Poly" (solid, remove dead copper, pour order 33): 63,57.5 63,54.25 ccw(c64.25,54.25) 64.25,53 81.25,53 ccw(c81.25,54.25) 82.5,54.25 82.5,61.25 ccw(c81.25,61.25) 81.25,62.5 79.25,62.5 cw(c79.25,63.75) 78,63.75 78,74.25 ccw(c76.75,74.25) 76.75,75.5 42.25,75.5 ccw(c42.25,74.25) 41,74.25 41,61.25 cw(c39.75,61.25) 39.75,60 32.75,60 ccw(c32.75,58.75) 31.5,58.75 31.5,55.25 ccw(c32.75,55.25) 32.75,54 44.25,54 ccw(c44.25,55.25) 45.5,55.25 45.5,69.75 cw(c46.75,69.75) 46.75,71 72.5,71 cw(c72.5,69.75) 73.75,69.75 73.75,63.75 cw(c72.5,63.75) 72.5,62.5 70.5,62.5 ccw(c70.5,61.25) 69.25,61.25 69.25,60 cw(c68.05,60) 68.05,58.8 64.3,58.8 ccw(c64.3,57.5)
NetF5_2 on Top Layer "Servo Power Top Poly" (solid, pour order 32): 25.25,73.25 25.25,63.25 ccw(c26.5,63.25) 26.5,62 29.25,62 cw(c29.25,60.75) 30.5,60.75 30.5,55.25 cw(c29.25,55.25) 29.25,54 12.75,54 cw(c12.75,55.15) 11.6,55.15 11.6,73.35 cw(c12.75,73.35) 12.75,74.5 13.25,74.5 cw(c13.25,73.35) 14.4,73.35 14.4,65.6 ccw(c15.5,65.6) 15.5,64.5 21.25,64.5 ccw(c21.25,65.7) 22.45,65.7 22.45,73.2 cw(c23.75,73.2) 23.75,74.5 24,74.5 cw(c24,73.25)
GND on Top Layer "Top GND Poly" (hatched 45Degree grid 0.508 track 0.203, remove dead copper, pour order 28): 0,85 96,85 96,0 0,0
NetF2_1 on Top Layer "M1 Fused Poly" (solid, remove dead copper, pour order 15): 5,37.25 5,51.75 cw(c6.25,51.75) 6.25,53 29.25,53 cw(c29.25,51.75) 30.5,51.75 30.5,48.25 cw(c29.25,48.25) 29.25,47 10.75,47 ccw(c10.75,45.75) 9.5,45.75 9.5,37.25 cw(c8.25,37.25) 8.25,36 6.25,36 cw(c6.25,37.25)
NetF3_1 on Top Layer "M2 Fused Poly" (solid, remove dead copper, pour order 17): 11.75,46 29.25,46 cw(c29.25,44.75) 30.5,44.75 30.5,41.25 cw(c29.25,41.25) 29.25,40 16.25,40 ccw(c16.25,38.75) 15,38.75 15,26.5 cw(c13.75,26.5) 13.75,25.25 6.25,25.25 cw(c6.25,26.5) 5,26.5 5,28.5 cw(c6.25,28.5) 6.25,29.75 9.25,29.75 ccw(c9.25,31) 10.5,31 10.5,44.75 cw(c11.75,44.75)
NetF4_1 on Top Layer "M3 Fused Poly" (solid, remove dead copper, pour order 18): 17.25,39 29.25,39 cw(c29.25,37.75) 30.5,37.75 30.5,34.25 cw(c29.25,34.25) 29.25,33 21.75,33 ccw(c21.75,31.75) 20.5,31.75 20.5,16.5 cw(c19.17,16.5) 19.17,15.17 6.33,15.17 cw(c6.33,16.5) 5,16.5 5,18.5 cw(c6.17,18.5) 6.17,19.67 14.67,19.67 ccw(c14.67,21) 16,21 16,37.75 cw(c17.25,37.75)
"+24V (Batt)" on Top Layer "+24V (Batt) Poly" (solid, remove dead copper, pour order 8): 52,64.25 63,64.25 63,62.75 56.5,62.75 56.5,41.25 63,41.25 63,39.75 56.5,39.75 56.5,26 71,26 71,10 52,10
"Batt VIN" on Top Layer "Batt VIN Poly" (solid, remove dead copper, pour order 1): 32.75,32 44.75,32 cw(c44.75,30.75) 46,30.75 46,29.25 ccw(c47.25,29.25) 47.25,28 49.5,28 cw(c49.5,26.68) 50.82,26.68 50.82,11.32 cw(c49.5,11.32) 49.5,10 42.5,10 cw(c42.5,11.25) 41.25,11.25 41.25,25 32.75,25 cw(c32.75,26.25) 31.5,26.25 31.5,30.75 cw(c32.75,30.75)
NetF1_1 on Top Layer "NONET_L01_P-001" (solid, remove dead copper, pour order 0): 24.25,32 29.25,32 cw(c29.25,30.75) 30.5,30.75 30.5,11.25 cw(c29.25,11.25) 29.25,10 24.25,10 cw(c24.25,11.33) 22.92,11.33 22.92,30.67 cw(c24.25,30.67)
GND on Bottom Layer "Bottom GND Poly" (hatched 45Degree grid 0.508 track 0.203, remove dead copper, pour order 29): 0,85 96,85 96,0 0,0
NetF5_2 on Bottom Layer "Servo Power Bottom Poly" (solid, pour order 27): 25.25,73.25 25.25,63.25 ccw(c26.5,63.25) 26.5,62 29.25,62 cw(c29.25,60.75) 30.5,60.75 30.5,55.25 cw(c29.25,55.25) 29.25,54 12.75,54 cw(c12.75,55.15) 11.6,55.15 11.6,73.35 cw(c12.75,73.35) 12.75,74.5 13.25,74.5 cw(c13.25,73.35) 14.4,73.35 14.4,65.6 ccw(c15.5,65.6) 15.5,64.5 21.25,64.5 ccw(c21.25,65.7) 22.45,65.7 22.45,73.2 cw(c23.75,73.2) 23.75,74.5 24,74.5 cw(c24,73.25)
NetC19_2 on Bottom Layer "LX Bottonm Poly" (solid, remove dead copper, pour order 23): 61.5,62.25 61.5,54.25 cw(c60.25,54.25) 60.25,53 58.25,53 cw(c58.25,54.25) 57,54.25 57,61 cw(c58.25,61) 58.25,62.25
+5V on Bottom Layer "+5V Bottom Poly" (solid, remove dead copper, pour order 6): 63.75,36.5 67.75,36.5 ccw(c67.75,37.75) 68.925,38.175 cw(c70.25,38.175) 70.25,39.5 82,39.5 ccw(c82,40.75) 83.25,40.75 83.25,58.25 cw(c84.5,58.25) 84.5,59.5 91.5,59.5 cw(c91.5,58.2) 92.8,58.2 92.8,56.8 cw(c91.64,56.8) 91.64,55.64 88.14,55.64 ccw(c88.14,54.5) 87,54.5 87,50.75 ccw(c88.33,50.75) 88.33,49.42 91.58,49.42 cw(c91.58,48.2) 92.8,48.2 92.8,46.8 cw(c91.56,46.8) 91.56,45.56 88.31,45.56 ccw(c88.31,44.25) 87,44.25 87,40.5 ccw(c88.16,40.5) 88.16,39.34 91.66,39.34 cw(c91.66,38.2) 92.8,38.2 92.8,36.8 cw(c91.48,36.8) 91.48,35.48 88.23,35.48 ccw(c88.23,34.25) 87,34.25 87,30.5 ccw(c88.24,30.5) 88.24,29.26 91.49,29.26 cw(c91.49,27.95) 92.8,27.95 92.8,26.55 cw(c91.65,26.55) 91.65,25.4 88.15,25.4 ccw(c88.15,24.25) 87,24.25 87,20.5 ccw(c88.32,20.5) 88.32,19.18 91.57,19.18 cw(c91.57,17.95) 92.8,17.95 92.8,16.55 cw(c91.57,16.55) 91.57,15.32 84.18,15.32 cw(c84.18,16.5) 83,16.5 83,28.75 ccw(c81.75,28.75) 81.75,30 63.75,30 cw(c63.75,31.25) 62.5,31.25 62.5,35.25 cw(c63.75,35.25)
NetC9_2 on Bottom Layer "LX Bottom Poly" (solid, remove dead copper, pour order 20): 61.5,39.25 61.5,31.25 cw(c60.25,31.25) 60.25,30 58.25,30 cw(c58.25,31.25) 57,31.25 57,38 cw(c58.25,38) 58.25,39.25
+8V4 on Bottom Layer "+8V4 Bottom Poly" (solid, remove dead copper, pour order 19): 63,57.5 63,54.25 ccw(c64.25,54.25) 64.25,53 81.25,53 ccw(c81.25,54.25) 82.5,54.25 82.5,61.25 ccw(c81.25,61.25) 81.25,62.5 79.25,62.5 cw(c79.25,63.75) 78,63.75 78,74.25 ccw(c76.75,74.25) 76.75,75.5 42.25,75.5 ccw(c42.25,74.25) 41,74.25 41,61.25 cw(c39.75,61.25) 39.75,60 32.75,60 ccw(c32.75,58.75) 31.5,58.75 31.5,55.25 ccw(c32.75,55.25) 32.75,54 44.25,54 ccw(c44.25,55.25) 45.5,55.25 45.5,69.75 cw(c46.75,69.75) 46.75,71 72.5,71 cw(c72.5,69.75) 73.75,69.75 73.75,63.75 cw(c72.5,63.75) 72.5,62.5 70.5,62.5 ccw(c70.5,61.25) 69.25,61.25 69.25,60 cw(c68.05,60) 68.05,58.8 64.3,58.8 ccw(c64.3,57.5)
"Motor VIN" on Bottom Layer "Motor VIN Poly" (solid, remove dead copper, pour order 13): 74.64,9.14 74.64,23.89 cw(c75.75,23.89) 75.75,25 80,25 cw(c80,23.84) 81.16,23.84 81.16,4.66 cw(c80,4.66) 80,3.5 41.25,3.5 cw(c41.25,4.75) 40,4.75 40,31.75 ccw(c38.75,31.75) 38.75,33 32.75,33 cw(c32.75,34.25) 31.5,34.25 31.5,51.75 cw(c32.75,51.75) 32.75,53 43.25,53 cw(c43.25,51.75) 44.5,51.75 44.5,8 73.5,8 ccw(c73.5,9.14)
NetC19_2 on Power Layer "LX Middle Poly" (solid, remove dead copper, pour order 22): 61.5,62.25 61.5,54.25 cw(c60.25,54.25) 60.25,53 58.25,53 cw(c58.25,54.25) 57,54.25 57,61 cw(c58.25,61) 58.25,62.25
NetC9_2 on Power Layer "LX Middle Poly" (solid, remove dead copper, pour order 3): 61.5,39.25 61.5,31.25 cw(c60.25,31.25) 60.25,30 58.25,30 cw(c58.25,31.25) 57,31.25 57,38 cw(c58.25,38) 58.25,39.25
+5V on Power Layer "+5V Middle Poly" (solid, remove dead copper, pour order 21): 63.75,36.5 67.75,36.5 ccw(c67.75,37.75) 68.925,38.175 cw(c70.25,38.175) 70.25,39.5 82,39.5 ccw(c82,40.75) 83.25,40.75 83.25,58.25 cw(c84.5,58.25) 84.5,59.5 91.5,59.5 cw(c91.5,58.2) 92.8,58.2 92.8,56.8 cw(c91.64,56.8) 91.64,55.64 88.14,55.64 ccw(c88.14,54.5) 87,54.5 87,50.75 ccw(c88.33,50.75) 88.33,49.42 91.58,49.42 cw(c91.58,48.2) 92.8,48.2 92.8,46.8 cw(c91.56,46.8) 91.56,45.56 88.31,45.56 ccw(c88.31,44.25) 87,44.25 87,40.5 ccw(c88.16,40.5) 88.16,39.34 91.66,39.34 cw(c91.66,38.2) 92.8,38.2 92.8,36.8 cw(c91.48,36.8) 91.48,35.48 88.23,35.48 ccw(c88.23,34.25) 87,34.25 87,30.5 ccw(c88.24,30.5) 88.24,29.26 91.49,29.26 cw(c91.49,27.95) 92.8,27.95 92.8,26.55 cw(c91.65,26.55) 91.65,25.4 88.15,25.4 ccw(c88.15,24.25) 87,24.25 87,20.5 ccw(c88.32,20.5) 88.32,19.18 91.57,19.18 cw(c91.57,17.95) 92.8,17.95 92.8,16.55 cw(c91.57,16.55) 91.57,15.32 84.18,15.32 cw(c84.18,16.5) 83,16.5 83,28.75 ccw(c81.75,28.75) 81.75,30 63.75,30 cw(c63.75,31.25) 62.5,31.25 62.5,35.25 cw(c63.75,35.25)
+8V4 on Power Layer "+8V4 Middle Poly" (solid, remove dead copper, pour order 11): 63,57.5 63,54.25 ccw(c64.25,54.25) 64.25,53 81.25,53 ccw(c81.25,54.25) 82.5,54.25 82.5,61.25 ccw(c81.25,61.25) 81.25,62.5 79.25,62.5 cw(c79.25,63.75) 78,63.75 78,74.25 ccw(c76.75,74.25) 76.75,75.5 42.25,75.5 ccw(c42.25,74.25) 41,74.25 41,61.25 cw(c39.75,61.25) 39.75,60 32.75,60 ccw(c32.75,58.75) 31.5,58.75 31.5,55.25 ccw(c32.75,55.25) 32.75,54 44.25,54 ccw(c44.25,55.25) 45.5,55.25 45.5,69.75 cw(c46.75,69.75) 46.75,71 72.5,71 cw(c72.5,69.75) 73.75,69.75 73.75,63.75 cw(c72.5,63.75) 72.5,62.5 70.5,62.5 ccw(c70.5,61.25) 69.25,61.25 69.25,60 cw(c68.05,60) 68.05,58.8 64.3,58.8 ccw(c64.3,57.5)
NetF5_2 on Power Layer "Servo Power Middle Poly" (solid, pour order 24): 25.25,73.25 25.25,63.25 ccw(c26.5,63.25) 26.5,62 29.25,62 cw(c29.25,60.75) 30.5,60.75 30.5,55.25 cw(c29.25,55.25) 29.25,54 12.75,54 cw(c12.75,55.15) 11.6,55.15 11.6,73.35 cw(c12.75,73.35) 12.75,74.5 13.25,74.5 cw(c13.25,73.35) 14.4,73.35 14.4,65.6 ccw(c15.5,65.6) 15.5,64.5 21.25,64.5 ccw(c21.25,65.7) 22.45,65.7 22.45,73.2 cw(c23.75,73.2) 23.75,74.5 24,74.5 cw(c24,73.25)
Earth on Power Layer "Earth Poly" (solid, pour order 30): 0,86 96,86 96,0 87,0 87,76 9,76 9,0 0,0
GND on Ground Layer "Middle GND Layer" (solid, remove dead copper, pour order 31): 0,85 96,85 96,0 0,0

## Keep-outs
Keep-Out Layer:
  the board outline again, w0.2

## Silkscreen, mask and mechanical layers (free items; w line width, h text height)
Top Overlay:
  drawing of 23 lines, arcs and shapes, not listed
  text "SERVO CONTROL" at 59.545,78.75 h1.5
  text "SERVOS" at 14.166,78.15 h1.5
  text "1" at 7.132,76.11 h1
  text "2" at 29.385,76.11 h1
  text "1" at 43.483,74.8 h1
  text "2" at 45.857,74.8 h1
  text "3" at 48.397,74.8 h1
  text "4" at 50.937,74.8 h1
  text "NC" at 52.977,74.8 h1
  text "-" at 56.017,74.8 h1
  text "+5V" at 86.701,66.3 h1.5
  text "-" at 94.75,63.4 h1.5 r180
  text "3" at 6.799,63.14 h1
  text "4" at 29.385,63.14 h1
  text "+8V4" at 8.065,60.1 h1.5
  text "+" at 94.75,58.32 h1.5 r180
  text "SERVO" at 20.1,53.501 h1.5 r90
  text "-" at 94.75,53.32 h1.5 r180
  text "M1" at 20.1,49 h1.5 r90
  text "+" at 94.75,48.24 h1.5 r180
  text "-" at 94.75,43.24 h1.5 r180
  text "M2" at 20.1,41.75 h1.5 r90
  text "+24V" at 5.601,41.27 h1.5
  text "+" at 94.75,38.16 h1.5 r180
  text "MOTOR CONTROLLERS" at 12.9,37.496 h1.5 r270
  text "+" at 1.75,36.87 h1.5
  text "M3" at 20.1,34.75 h1.5 r90
  text "M1" at 1.25,34.33 h1.5
  text "-" at 94.75,33.16 h1.5 r180
  text "-" at 1.75,31.79 h1.5
  text "+" at 94.75,28.08 h1.5 r180
  text "+" at 1.75,26.79 h1.5
  text "BATT" at 20.1,26.251 h1.5 r90
  text "M2" at 1,24.25 h1.5
  text "-" at 94.75,23.08 h1.5 r180
  text "-" at 1.75,21.71 h1.5
  text "+" at 94.75,18 h1.5 r180
  text "+" at 1.75,16.71 h1.5
  text "M3" at 1,14.17 h1.5
  text "-" at 1.75,11.63 h1.5
  text "BATTERY" at 27.182,3.25 h1.5
  text "SWITCH" at 48.376,3.25 h1.5
  text "RELAY" at 69.321,3.25 h1.5
  text "+" at 26.6,0.75 h1.5
  text "-" at 36.76,0.75 h1.5
Bottom Overlay:
  drawing of 90 lines, arcs and shapes, not listed
  text "Designed by / Russell MacGregor" at 27.261,80.25 h1
  text "SERVO CONTROL" at 78.539,78.75 h1.5
  text "SERVOS" at 22.684,78.15 h1.5
  text "1" at 7.05,76.11 h1
  text "2" at 30.616,76.11 h1
  text "1" at 43.817,74.8 h1
  text "2" at 46.523,74.8 h1
  text "3" at 49.063,74.8 h1
  text "4" at 51.603,74.8 h1
  text "NC" at 54.643,74.8 h1
  text "-" at 56.683,74.8 h1
  text "S" at 10.955,74.5 h1.5
  text "+" at 13.495,74.5 h1.5
  text "-" at 16.035,74.5 h1.5
  text "S" at 21.81,74.5 h1.5
  text "+" at 24.35,74.5 h1.5
  text "-" at 26.89,74.5 h1.5
  text "V0" at 90.449,71.45 h2.5
  text "+5V" at 90.699,66.3 h1.5
  text "-" at 10.96,64.25 h1.5
  text "+" at 13.5,64.25 h1.5
  text "S" at 16.04,64.25 h1.5
  text "-" at 21.81,64.25 h1.5
  text "+" at 24.35,64.25 h1.5
  text "S" at 26.89,64.25 h1.5
  text "-" at 93.75,63.4 h1.5 r180
  text "3" at 7.05,63.14 h1
  text "4" at 30.616,63.14 h1
  text "SERVO" at 20.1,60.499 h1.5 r90
  text "+" at 93.75,58.32 h1.5 r180
  text "-" at 93.75,53.32 h1.5 r180
  text "M1" at 20.1,51 h1.5 r90
  text "+" at 93.75,48.24 h1.5 r180
  text "M2" at 20.1,44.25 h1.5 r90
  text "-" at 93.75,43.24 h1.5 r180
  text "Rover Power / Board" at 78.95,43.161 h3
  text "+24V" at 11.099,41.27 h1.5
  text "+" at 93.75,38.16 h1.5 r180
  text "M3" at 20.1,37.25 h1.5 r90
  text "+" at 2.75,36.87 h1.5
  text "M1" at 3.25,34.33 h1.5
  text "-" at 93.75,33.16 h1.5 r180
  text "-" at 2.75,31.79 h1.5
  text "BATT" at 20.1,31.749 h1.5 r90
  text "+" at 93.75,28.08 h1.5 r180
  text "+" at 2.75,26.79 h1.5
  text "M2" at 3.5,24.25 h1.5
  text "-" at 93.75,23.08 h1.5 r180
  text "-" at 2.75,21.71 h1.5
  text "+" at 93.75,18 h1.5 r180
  text "+" at 2.75,16.71 h1.5
  text "M3" at 3.5,14.17 h1.5
  text "MOTOR CONTROLLERS" at 12.9,12.504 h1.5 r270
  text "-" at 2.75,11.63 h1.5
  text "BATTERY" at 37.178,3.25 h1.5
  text "SWITCH" at 56.624,3.25 h1.5
  text "RELAY" at 76.319,3.25 h1.5
  text "+" at 27.6,0.75 h1.5
  text "-" at 37.76,0.75 h1.5
Poly Planning:
  drawing of 164 lines, arcs and shapes, not listed

## Text inside footprints (layer, text, board x,y; h text height)
X1: Top Overlay "Front" at 49.251,9.1 h1.5
X2: Top Overlay "[Front]" at 92.042,15.368 h0.75 r90
X3: Top Overlay "[Front]" at 4.958,39.502 h0.75 r270